# Altium PCB LABPCB.PcbDoc
Units mm, origin at the board's own origin, x right, y up, seen from the top; angles counter-clockwise.
Board outline 46 x 48.5 mm, 2 copper layers (Top Layer, Bottom Layer); 17 components, 9 nets, 55 pads, 2 vias.
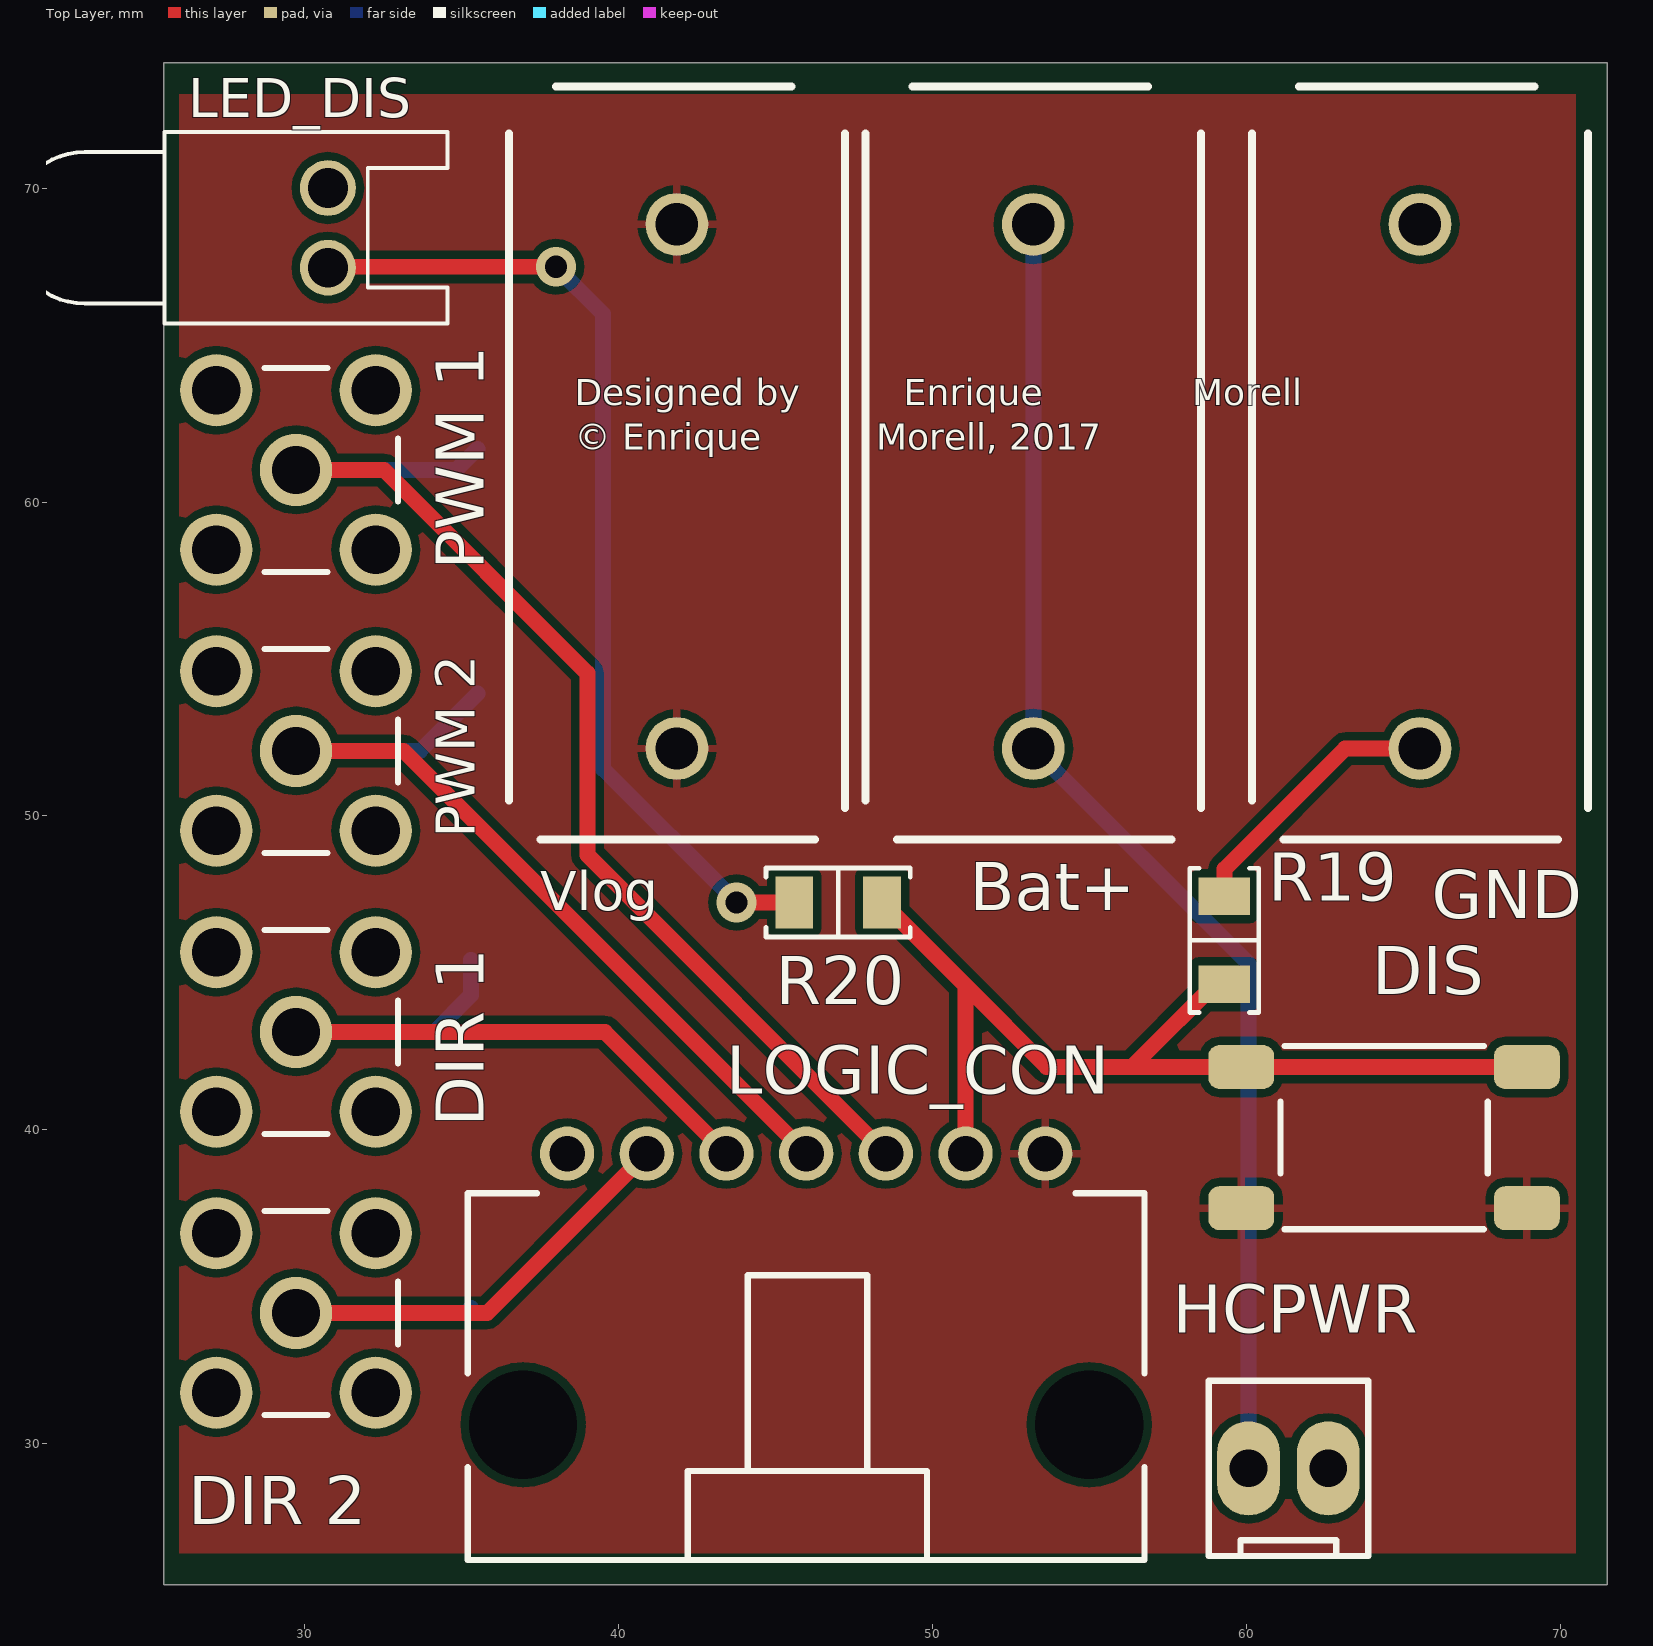
[diagram p0: Top Layer view]
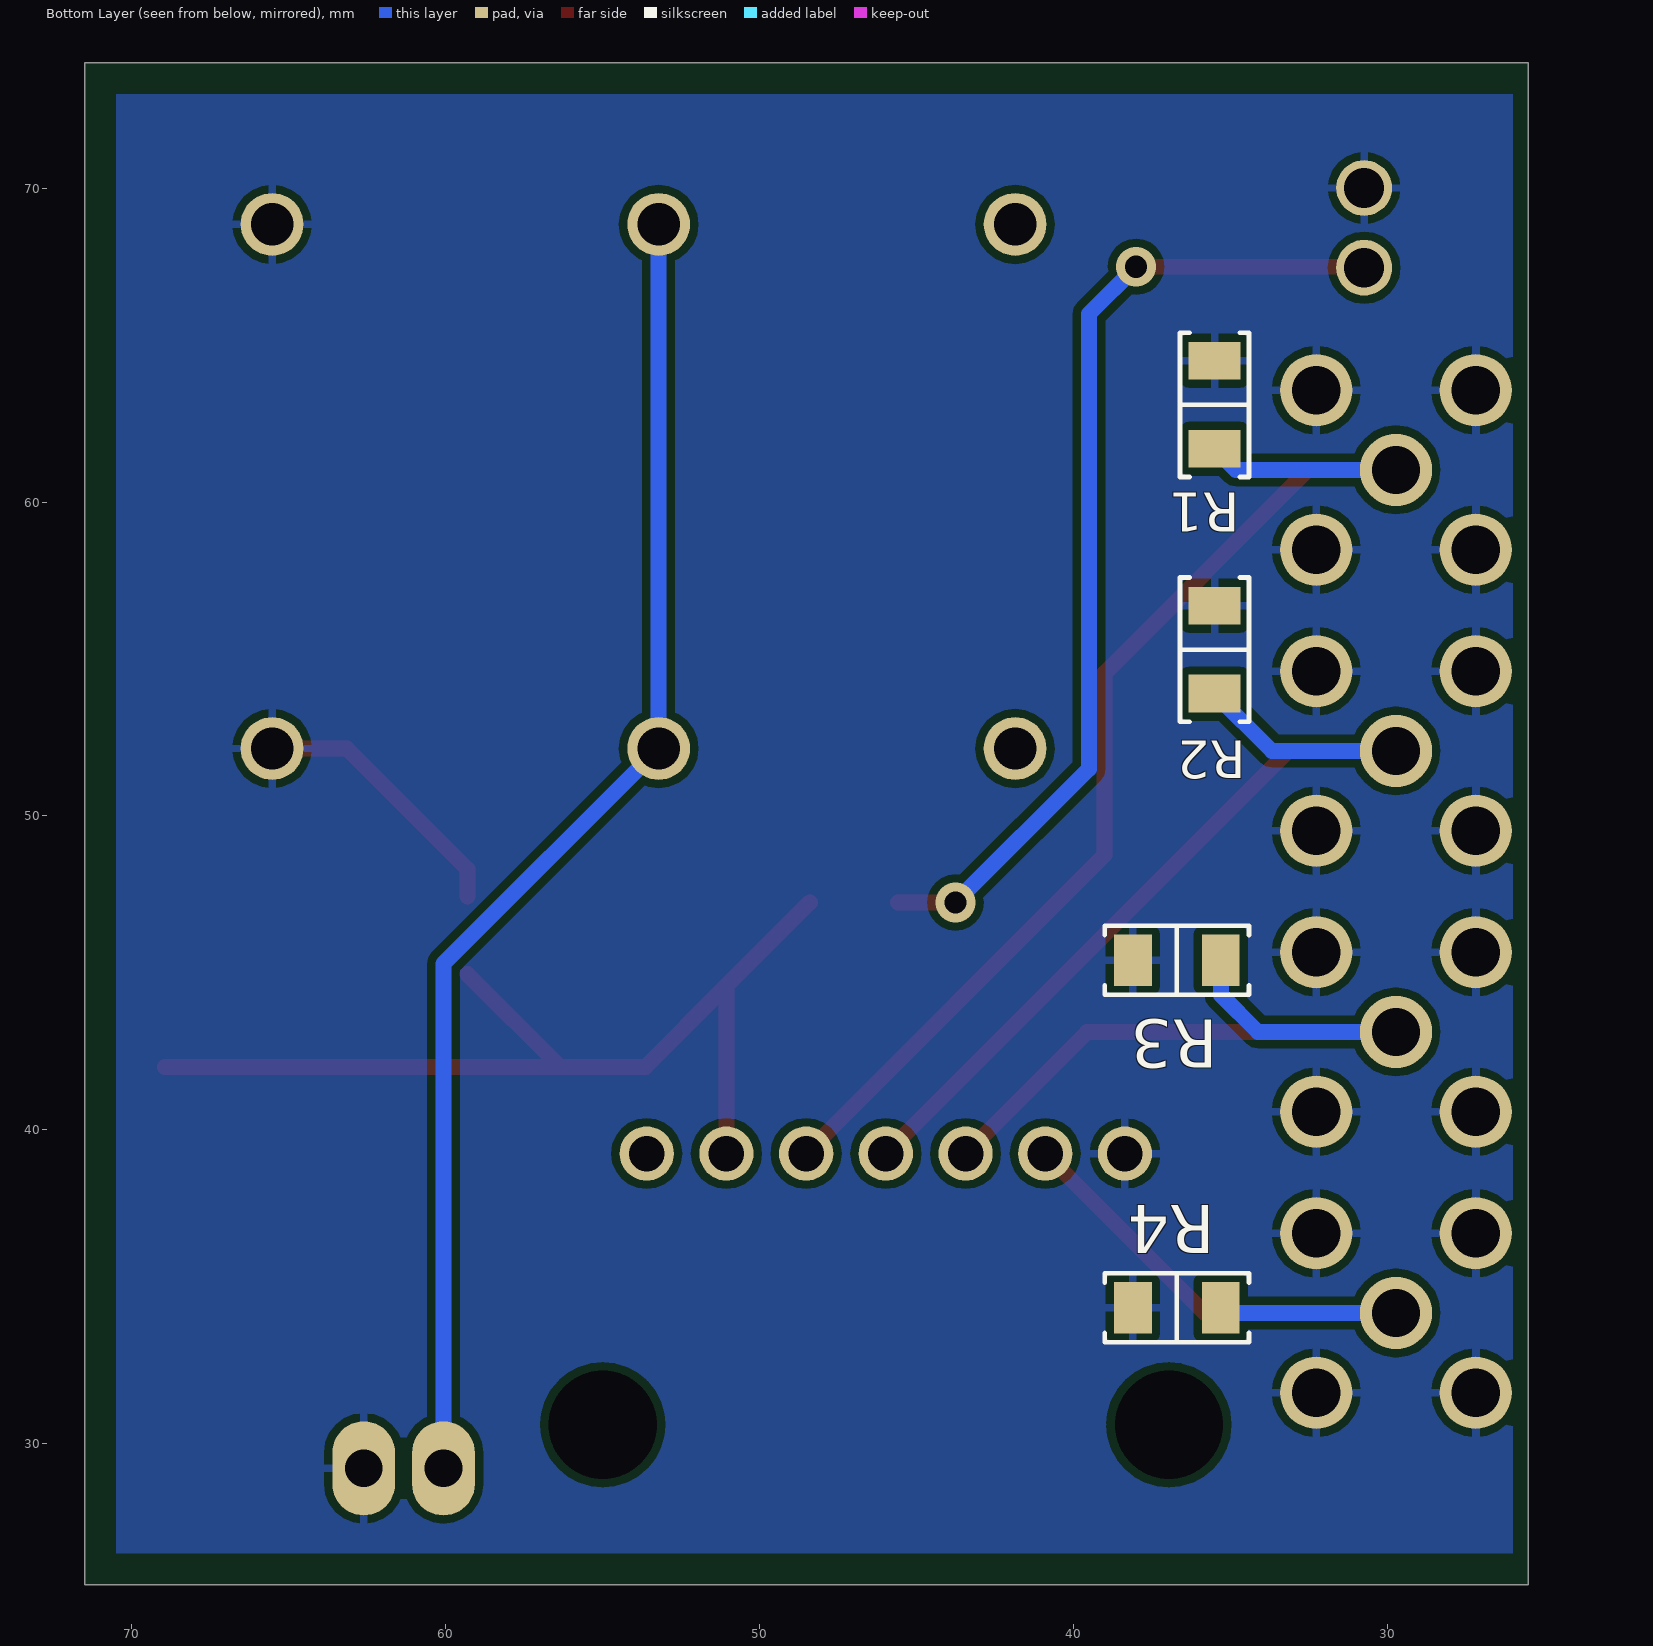
[diagram p1: Bottom Layer view, seen from below]
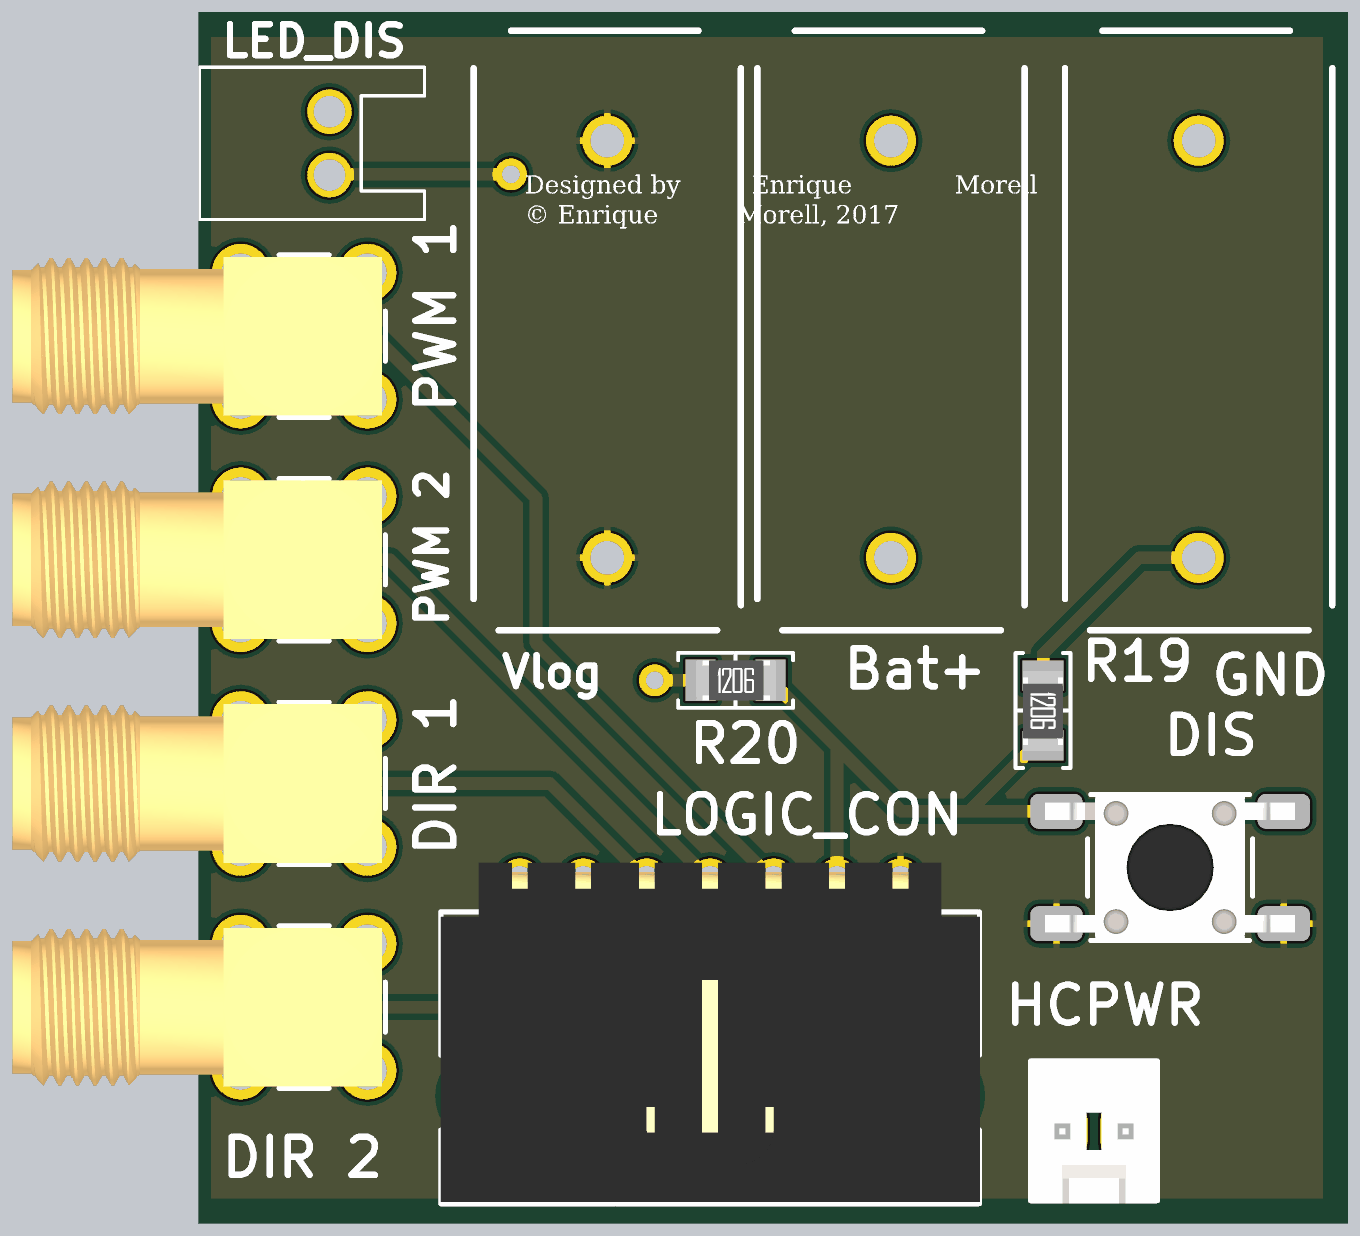
[diagram p2: 3D render of the assembled board from above, using the file's embedded part models]
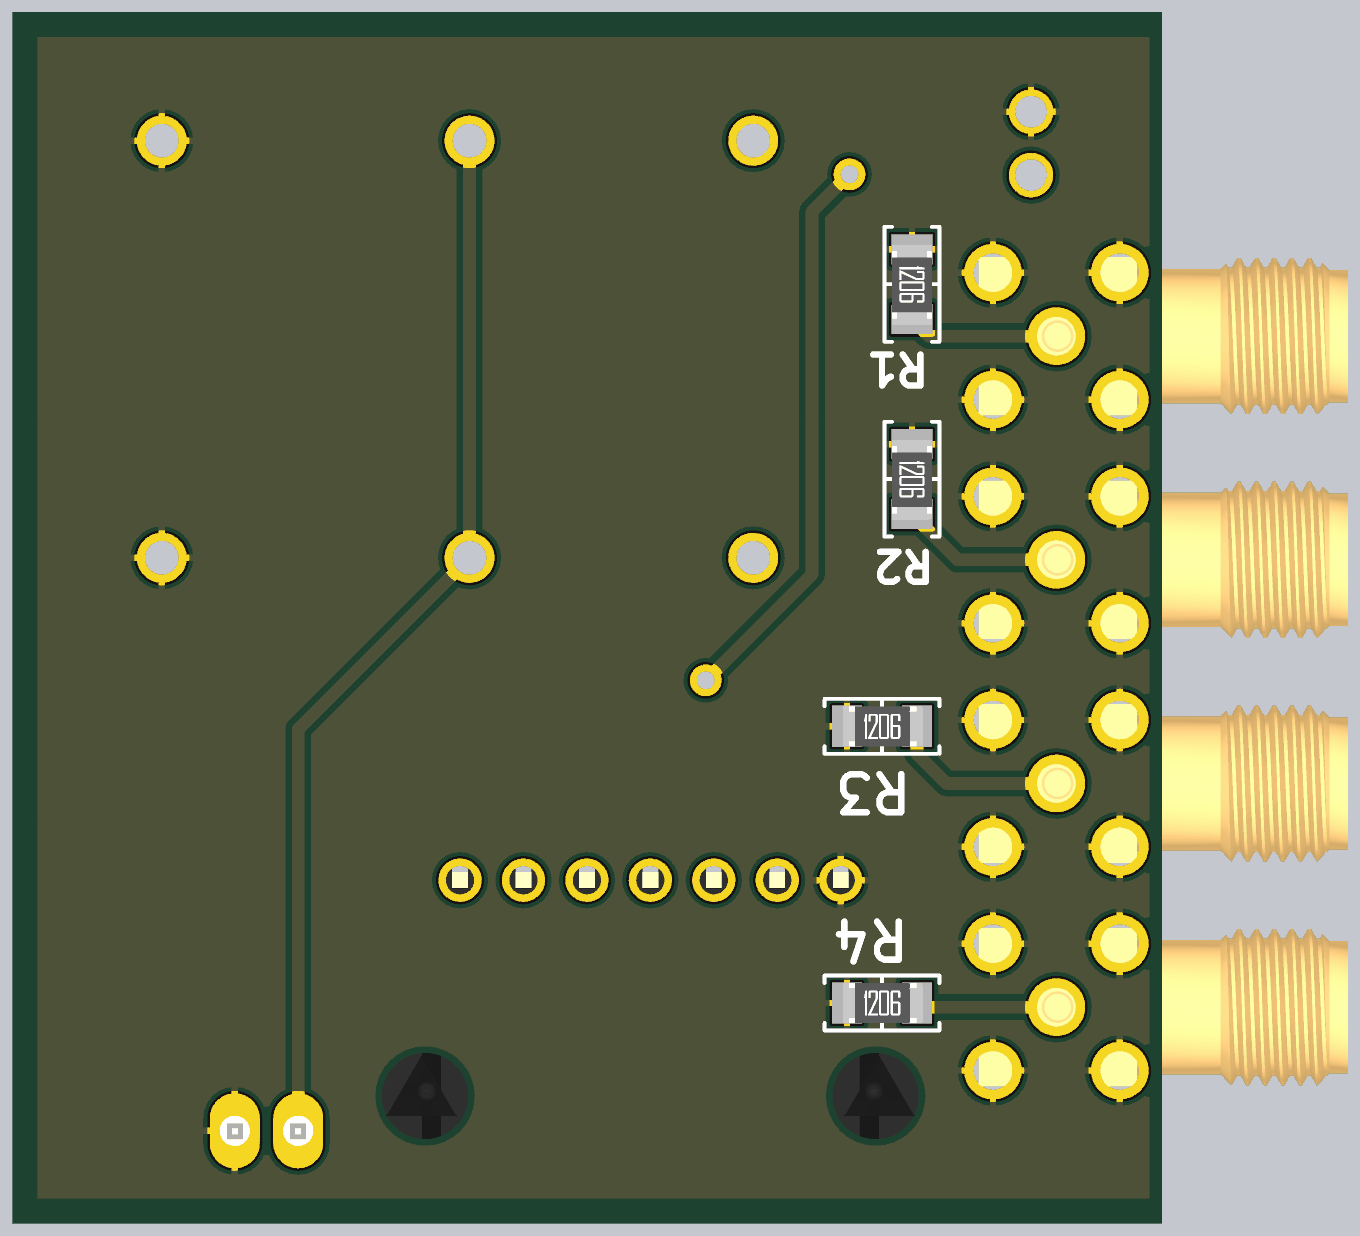
[diagram p3: 3D render of the assembled board from below, using the file's embedded part models]

## Layer stack, top to bottom
Top Solder: solder mask 0.0102, Solder Resist, Dk 3.5
Top Layer: signal copper 0.0356
Dielectric 1: dielectric 0.32, FR-4, Dk 4.8
Bottom Layer: signal copper 0.0356
Bottom Solder: solder mask 0.0102, Solder Resist, Dk 3.5

## Board outline
25.5,25.5 25.5,74 71.5,74 71.5,25.5

## Design rules (kind name [scope] priority, off if disabled: settings)
Clearance [All] p1: gap=0.254 ignorepadtopadclearanceinfootprint=FALSE except(0: Arc-Hole Track-Hole SMDPad-Hole THPad-Hole Via-Hole Fill-Hole Poly-Hole Region-Hole Text-Hole)
HoleSize [All] p1: absolutevalues=TRUE maxlimit=4.54 minlimit=0.025 maxpercent=80.000 minpercent=20.000
MinimumSolderMaskSliver [All] p1: minsoldermaskwidth=0.2
PolygonConnect [All] p1: connectstyle=Relief reliefconductorwidth=0.254 reliefentries=4 polygonreliefangle="90 Angle" airgapwidth=0.254
RoutingVias [All] p1: holewidth=0.711 width=1.27 viastyle="Through Hole" minholewidth=0.711 minwidth=1.27 maxholewidth=0.711 maxwidth=1.27
SilkToSolderMaskClearance [IsPad] p1: minsilkscreentomaskgap=0.15 clearancetoexposedcopper=TRUE
SolderMaskExpansion [All] p1: expansion=0.102
Width [All] p1: maxlimit=0.508 minlimit=0.254 preferedwidth=0.508
27 further rules are at their usual default settings.

## Components (designator, comment, footprint, x,y, rotation, side; value= is the part's Value field where it differs from the comment)
Bat+ "242431" "242431 Banana" 51.363,51.749 r90 top
"DIR 1" "5-1814400-1" "MOLEX SD-73100-0114" 29.718,43.116 r180 top
"DIR 2" "5-1814400-1" "MOLEX SD-73100-0114" 29.718,34.161 r180 top
DIS "FSM4JSMATR" "TE FSM4JSMA" 64.389,39.751 r90 top
GND "242431" "242431 Banana" 63.682,51.749 r90 top
HCPWR "0022272021" "MOLEX KK 0022272021" 61.341,29.21 r0 top
LED_DIS "LED0" LED-0 30.734,68.74 r270 top
LOGIC_CON "0705550041" "MOLEX SDA-70555-7PIN" 45.974,33.02 r180 top
"PWM 1" "5-1814400-1" "MOLEX SD-73100-0114" 29.718,61.024 r180 top
"PWM 2" "5-1814400-1" "MOLEX SD-73100-0114" 29.718,52.07 r180 top
R1 "9.53k" "RES 1206/3216" 35.5,63.1 r270 bottom
R2 "9.53k" "RES 1206/3216" 35.5,55.3 r270 bottom
R3 "9.53k" "RES 1206/3216" 36.7,45.404 r180 bottom
R4 "9.53k" "RES 1206/3216" 36.7,34.327 r180 bottom
R19 "9.53k" "RES 1206/3216" 59.3,46.036 r270 top
R20 "100" "RES 1206/3216" 46.993,47.244 r0 top
Vlog "242431" "242431 Banana" 40.005,51.749 r90 top (schematic designator +5/+3.3V)

## Footprints (in the part's own frame and the unit in brackets; to place one, negate y for a bottom-side part, rotate by r counter-clockwise, add the part's x,y. Pads: shape width x height; smd on the part's side, far side on the other; paste and mask are expansions set on the pad)
"242431 Banana" [mm] "Banana Jack 4mm"
  round 2 hole 1.35: 1(0.4,-1.85) 1(17.1,-1.85)
  silkscreen extent -2.5,-7.2 21.5,3.5
LED-0 [mil] "LED; 2 Leads"
  round 70 hole 50: 1(50,0) 2(-50,0)
  silkscreen extent -120,-400 120,150
"MOLEX KK 0022272021" [mm]
  oval 2x3 hole 1.2: 1(-1.27,0) 2(1.27,0)
  silkscreen extent -2.54,-2.79 2.54,2.79, body extent -2.54,-2.9 2.54,2.9, height 11.7
"MOLEX SD-73100-0114" [mm]
  round 2.304 hole 1.54: G(-2.54,2.54) G(2.54,2.54) S(0,0)
  round 2.302 hole 1.54: G(-2.54,-2.54) G(2.54,-2.54)
  silkscreen extent -3.25,-3.25 1,3.25, body extent -3.12,-3.17 11.68,3.17, height 9.67
"MOLEX SDA-70555-7PIN" [mm] "SL Right Angle Header W/LAtch & Trip-Pegs 2.54mm Centres"
  round 1.73 hole 1.13: 1(-7.62,-6.223) 2(-5.08,-6.223) 3(-2.54,-6.223) 4(0,-6.223) 5(2.54,-6.223) 6(5.08,-6.223) 7(7.62,-6.223)
  round 1.524 hole 3.45 unplated: 5(-9.02,2.417) 6(9.02,2.417)
  silkscreen extent -10.78,-4.95 10.78,6.73, body extent -10.8,-6.92 10.79,6.67, height 6.98
"RES 1206/3216" [mm] "Chip Resistor, 2-Leads, Body 3.13x1.55mm, IPC Medium Density"
  rect 1.2x1.65 smd: 1(-1.4,0) 2(1.4,0)
  silkscreen extent -2.3,-1.1 2.3,1.1, body extent -1.58,-0.8 1.62,0.8, height 0.6
"TE FSM4JSMA" [mm]
  rrect50% 1.4x2.1 smd: 1(2.25,4.55) 2(2.25,-4.55) 3(-2.25,4.55) 4(-2.25,-4.55)
  silkscreen extent -2.92,-3.3 2.92,3.3, body extent -3,-5 3,5, height 5.08

## Part data
Bat+ GND Vlog: "Banana PCB Connector", Manufacturer=Multicomp, Supplier Part Number 1=1698983, Voltage=30V, ComponentLink1Description=Datasheet, ComponentLink1URL=http://www.farnell.com/datasheets/1901211.pdf?_ga=2.243946508.88394351.1508160428-490126870.1506116288&_gac=1.47786581.1506116288.CjwKCAjw6ZLOBRALEiwAxzyCWz0InfLjFu8mp1t2E94Bo3V2sP4VEUhaMoYFsFDilr1LVY, ComponentLink2Description="Farnell Listing", ComponentLink2URL=http://fr.farnell.com/multicomp/24-243-2/fiche-femelle-ci-4mm-noir/dp/1698983, Number Of Levels=1, PartId=16448, Part Number=242431, Positions Per Level=1, Price=1.83, Supplier 1=Farnell
"DIR 1" "DIR 2" "PWM 1" "PWM 2": "CONN SMA JACK R/A 50 OHM PCB", Dielectric Material="Polytetrafluoroethylene (PTFE)", Frequency - Max="3 GHz", Housing Colour=Gold, Manufacturer="TE Connectivity AMP Connectors", Operating Temperature="-55°C ~ 85°C", Supplier Part Number 1=1248989, Body Finish=Gold, Body Material="Zinc Alloy", Center Contact Material="Beryllium Copper", Center Contact Plating=Gold, ComponentLink1Description=Datasheet, ComponentLink1URL=http://www.farnell.com/datasheets/1803168.pdf?_ga=2.243448460.88394351.1508160428-490126870.1506116288&_gac=1.223996649.1506116288.CjwKCAjw6ZLOBRALEiwAxzyCWz0InfLjFu8mp1t2E94Bo3V2sP4VEUhaMoYFsFDilr1LV, ComponentLink2Description="Farnell Listing", ComponentLink2URL=http://fr.farnell.com/te-connectivity-amp/5-1814400-1/embase-femelle-sma-angle-droit/dp/1248989?ost=5-1814400-1&iscrfnonsku=false&ddkey=http%3Afr-FR%2FElement14_France%2Fsearch, Contact Termination=Solder, Fastening Type=Threaded, Impedance="50 Ohm", Mounting Type="Through Hole, Right Angle", PartId=16436, Part Number=5-1814400-1, Price=1.53, Shield Termination=Solder, Style=SMA, Supplier 1=Farnell, Type="Jack, Female Socket"
DIS: "SWITCH TACTILE SPST-NO 0.05A 24V", Contact Rating @ Voltage="0.05A @ 24VDC", Illumination Type, Colour=-, Manufacturer="TE Connectivity Alcoswitch Switches", Operating Force=160gf, Operating Temperature="-35C ~ 85C", Supplier Part Number 1=450-1759-2-ND, Actuator Orientation="Top Actuated", Actuator Type=Standard, Circuit=SPST-NO, ComponentLink1Description=Datasheet, ComponentLink1URL=http://www.te.com/commerce/DocumentDelivery/DDEController?Action=srchrtrv&DocNm=2-1437565-7&DocType=Customer+Drawing&DocLang=English, ComponentLink2Description="Digi-Key Listing", ComponentLink2URL=http://www.digikey.com/product-detail/en/FSM4JSMATR/450-1759-2-ND/529675, Illumination=Non-Illuminated, Illumination Voltage=-, Mechanical Life="100,000 Cycles", PartId=8249, Part Number=FSM4JSMATR, Price=0.128, Supplier 1=Digi-Key, Switch Function=Off-Mom, Switch Travel=0.25mm
HCPWR: "CONN HEADER 2POS .100 VERT TIN", Colour=Natural, Manufacturer="Molex, LLC", Supplier Part Number 1=WM4111-ND, ComponentLink1Description=Datasheet, ComponentLink1URL=http://www.molex.com/pdm_docs/sd/022272021_sd.pdf, ComponentLink2Description="Digi-Key Listing", ComponentLink2URL=http://www.digikey.com/product-search/en?keywords=22-27-2021, Contact Finish=Tin, Fastening Type="Friction Lock", Number Of Positions=2, Number Of Rows=1, PartId=9719, Part Number=0022272021, Pitch="0.100\" (2.54mm)", Price=0.25, Series="KK 6410", Supplier 1=Digi-Key, Type="Header, Unshrouded"
LED_DIS: "Typical INFRARED GaAs LED", LatestRevisionDate=08-Jul-2005, LatestRevisionNote="Mech Layer 1 removed.", PackageDescription="LED; 2 Leads", PackageReference=LED-0, Published=8-Jun-2000, Publisher="Altium Limited"
LOGIC_CON: "CONN HEADER 7POS .100 R/A 15AU", Colour=Black, Manufacturer="Molex, LLC", Supplier Part Number 1=WM4180-ND, ComponentLink1Description=Datasheet, ComponentLink1URL=http://www.molex.com/pdm_docs/sd/705550001_sd.pdf, ComponentLink2Description="Digi-Key Listing", ComponentLink2URL=http://www.digikey.ca/product-detail/en/0705550041/WM4180-ND/1643414, Contact Finish=Gold, Fastening Type=-, Number Of Positions=7, Number Of Rows=1, PartId=7813, Part Number=0705550041, Pitch="0.100\" (2.54mm)", Price=3.99, Series=70555, Supplier 1=Digi-Key, Type="Through Hole, Right Angle"
R1 R2 R3 R4 R19: library part ERJ-8ENF9531V, "RES SMD 9.53K OHM 1% 1/4W 1206", Device Package="1206 (3216 Metric)", Manufacturer="Panasonic Electronic Components", PowerRating="0.25W, 1/4W", Supplier Part Number 1=P9.53KFTR-ND, TemperatureCoefficient=100ppm/C, TemperatureRange="-55C ~ 155C", Tolerance=1%, ComponentLink1Description=Datasheet, ComponentLink1URL=http://industrial.panasonic.com/www-cgi/jvcr13pz.cgi?E+PZ+3+AOA0002+ERJ8ENF9531V+7+WW, ComponentLink2Description="Digi-Key listing", ComponentLink2URL=http://digikey.com/product-detail/en/ERJ-8ENF9531V/P9.53KFTR-ND/89055, PartId=3197, Part Number=ERJ-8ENF9531V, Price=0.0093, Supplier 1=Digi-Key, Type="Thick Film"
R20: library part ERA-8AEB101V, "RES SMD 100 OHM 0.1% 1/4W 1206", Device Package="1206 (3216 Metric)", Manufacturer="Panasonic Electronic Components", PowerRating="0.25W, 1/4W", Supplier Part Number 1=P100BCTR-ND, TemperatureCoefficient=25ppm/C, TemperatureRange="-55C ~ 155C", Tolerance=0.1%, ComponentLink1Description=Datasheet, ComponentLink1URL=http://industrial.panasonic.com/lecs/www-data/pdf/AOA0000/AOA0000CE26.pdf, ComponentLink2Description="Digi-Key listing", ComponentLink2URL=http://digikey.com/product-detail/en/ERA-8AEB101V/P100BCTR-ND/3070736, PartId=3388, Part Number=ERA-8AEB101V, Price=0.1954, Supplier 1=Digi-Key, Type="Thin Film"

## Via types
v1: diameter 1.27, hole 0.711, Top Layer to Bottom Layer, 2 vias

## Nets (pads, with @x,y where several pads share a name; then routed paths per layer and width w, separated by ;. In a path a pad name is that pad's centre, name@x,y a point inside that pad or via, vN(x,y) a via of type N, cw(c..) or ccw(c..) an arc to the next point about the centre after c; other vN are vias at no path point)
+5/+3.3V: DIS.3 DIS.4 LOGIC_CON.1 Vlog.1
DIR1: "DIR 1.S" LOGIC_CON.5@43.434,39.243 R3.2 | length 22.5
  Top Layer w0.508: 29.718,43.116 39.561,43.116 LOGIC_CON.5@43.434,39.243
  Bottom Layer w0.508: 29.718,43.116 34.116,43.116 35.3,44.3 R3.2
DIR2: "DIR 2.S" LOGIC_CON.6@40.894,39.243 R4.2 | length 18.9
  Top Layer w0.508: 29.718,34.161 35.812,34.161 LOGIC_CON.6@40.894,39.243
  Bottom Layer w0.508: 29.718,34.161 35.134,34.161 R4.2
DIS: DIS.1 DIS.2 LOGIC_CON.2 R19.2 R20.2 | length 32.2
  Top Layer w0.508: R20.2 51.054,44.583 ; LOGIC_CON.2 51.054,44.583 ; R19.2@59.309,44.958 56.352,42.001 ; DIS.2 DIS.1 56.352,42.001 ; 51.054,44.583 53.636,42.001 56.352,42.001
GND: "DIR 1.G" "DIR 2.G" "PWM 1.G" "PWM 2.G" GND.1 HCPWR.2 LED_DIS.2 LOGIC_CON.7 R1.1 R2.1 R3.1 R4.1 R19.1 | length 8.8
  Top Layer w0.508: 32.258,54.61 32.368,54.5 ; R19.1@59.309,47.436 59.309,48.309 63.149,52.149 GND.1@65.532,52.149
NetLED_DIS_1: LED_DIS.1 R20.1 | length 31.8
  Top Layer w0.508: LED_DIS.1 30.764,67.5 v1(38,67.5) ; v1(43.756,47.244) R20.1
  Bottom Layer w0.508: v1(38,67.5) 39.5,66 39.5,51.5 v1(43.756,47.244)
PWM1: "PWM 1.S" LOGIC_CON.3 R1.2 | length 37.3
  Top Layer w0.508: 29.718,61.024 32.524,61.024 39,54.549 39,48.757 LOGIC_CON.3
  Bottom Layer w0.508: 29.718,61.024 34.824,61.024 R1.2
PWM2: "PWM 2.S" LOGIC_CON.4 R2.2 | length 28.2
  Top Layer w0.508: 29.718,52.07 33.147,52.07 LOGIC_CON.4
  Bottom Layer w0.508: 29.8,52.152 29.718,52.07 33.67,52.07 R2.2
V+: Bat+.1 HCPWR.1 | length 42.5
  Bottom Layer w0.508: Bat+.1@53.213,68.849 53.213,52.149 60.071,45.291 HCPWR.1
pads on no net: LOGIC_CON.5@54.994,30.603 LOGIC_CON.6@36.954,30.603

## Polygon pours and split planes (outlines as drawn)
GND on Bottom Layer "GND_L02_P000" (solid, remove dead copper, pour order 0): 26,73 70.5,73 70.5,26.5 26,26.5
+5/+3.3V on Top Layer "+5/+3.3V_L01_P002" (solid, remove dead copper, pour order 2): 26,73 70.5,73 70.5,26.5 26,26.5

## Silkscreen, mask and mechanical layers (free items; w line width, h text height)
Top Overlay:
  text "Designed by         Enrique             Morell / © Enrique          Morell, 2017" at 38.6,61.4 h1.42
Mechanical 1:
  the board outline again, w0.1